# Altium PCB PCB1.PcbDoc (part 2 of 2)
Units mil, origin at the board's own origin, x right, y up, seen from the top; angles counter-clockwise.
Board outline 3500 x 3500 mil, 2 copper layers (Top Layer, Bottom Layer); 93 components, 107 nets, 503 pads, 226 vias.
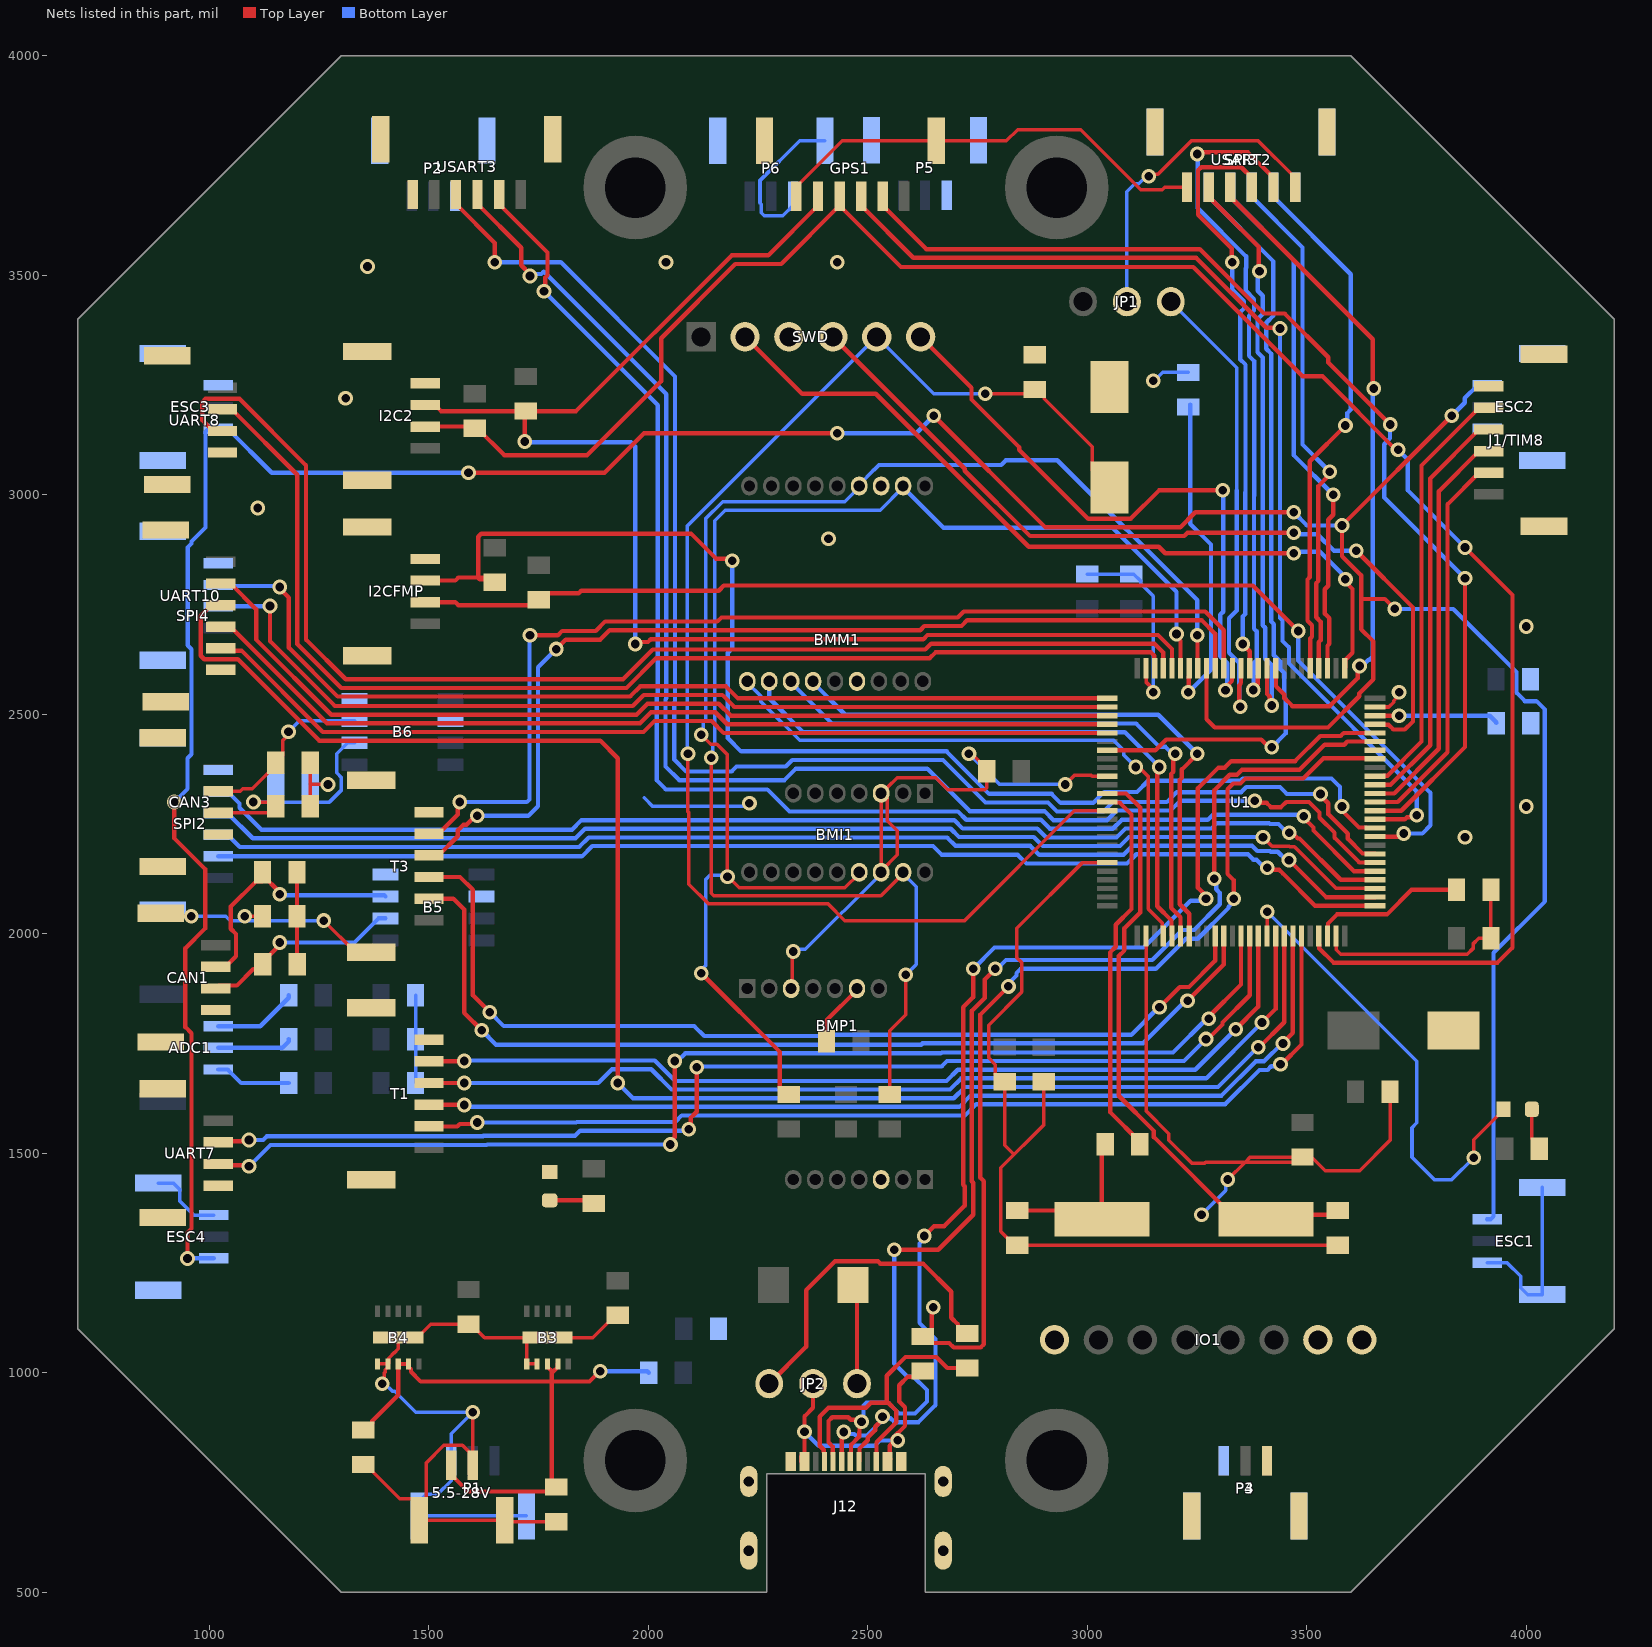
[diagram p2: the nets of this part, all layers, seen from the top]

## Via types
v1: diameter 33.46, hole 19.68, Top Layer to Bottom Layer, 226 vias

## Nets (pads, with @x,y where several pads share a name; then routed paths per layer and width w, separated by ;. In a path a pad name is that pad's centre, name@x,y a point inside that pad or via, vN(x,y) a via of type N, cw(c..) or ccw(c..) an arc to the next point about the centre after c; other vN are vias at no path point) (continued)
GND: 5.5-28V.2 5.5-28V.3 5.5-28V.4 B1(RESET).2 B2.2 B3.1 B3.2 B3.11 B4.1 B4.2 B4.11 B5.2 B5.8 B6.2 B6.8 BMI1.3 BMI1.13 BMM1.3 BMM1.10 BMP1.3 BMP1.10 C1.1 C2.1 C3.2 C4.2 C5.2 C6.1 C7.2 C8.1 C9.1 C10.1 C11.1 C12.1 C13.1 C14.1 C15.1 C16.1 C17.1 C18.1 C19.1 C20.2 CAN1.4 CAN1.5 CAN1.6 CAN3.4 CAN3.5 CAN3.6 ESC1.3 ESC1.4 ESC1.5 ESC2.3 ESC2.4 ESC2.5 ESC3.3 ESC3.4 ESC3.5 ESC4.3 ESC4.4 ESC4.5 GPS1.6 GPS1.7 GPS1.8 I2C2.4 I2C2.5 I2C2.6 I2CFMP.4 I2CFMP.5 I2CFMP.6 IO1.1 IO1.2 IO1.8 J1/TIM8.6 J1/TIM8.7 J1/TIM8.8 J12.1 J12.2 J12.3 J12.4 J12.A1-B12 J12.A12-B1 P1.3 P1.4 P1.5 P2.3 P2.4 P2.5 P3.3 P3.4 P3.5 P4.3 P4.4 P4.5 P5.3 P5.4 P5.5 P6.3 P6.4 P6.5 POWER.K R2.1 R5.1 R18.2 R20.2 R22.2 SPI2.6 SPI2.7 SPI2.8 SPI3.6 SPI3.7 SPI3.8 SPI4.6 SPI4.7 SPI4.8 SWD.3 T1.6 T1.7 T1.8 T3.6 T3.7 T3.8 U1.10 U1.20 U1.27 U1.49 U1.74 U1.99 UART7.4 UART7.5 UART7.6 UART8.4 UART8.5 UART8.6 UART10.4 UART10.5 UART10.6 USART2.6 USART2.7 USART2.8 USART3.6 USART3.7 USART3.8 | length 11622.5
  Top Layer w8: CAN1.5@888.58,2046.65 895.24,2040 v1(958.5,2040) ; v1(1080,2040) C19.1@1120.63,2040 ; v1(1260,2030) 1260.63,2030 1332.68,1957.95 T3.7@1368.11,1957.95 ; C7.2@1350,790.63 1355.91,790.63 1433.8,712.73 1461.87,712.73 1477.56,697.05 5.5-28V.3@1477.56,663.58 ; B4.1@1384.66,1019.96 B4.2@1406.38,1019.96 ; v1(1393.5,975) 1398.38,979.87 1398.38,999.91 1400,1001.53 1400,1006.69 1406.38,1013.07 B4.2@1406.38,1019.96 ; 5.5-28V.2@1599.61,811.22 1576.32,834.51 1533.83,834.51 1493.24,793.93 1493.24,679.27 5.5-28V.3@1477.56,663.58 ; 5.5-28V.2@1599.8,789.76 1599.8,909.8 v1(1600,910) ; B3.2@1746.38,1019.96 B3.1@1722.76,1019.96 1722.76,1070.22 B3.11@1732.54,1080 ; C5.2@1790,660.63 1675.39,660.63 5.5-28V.4@1672.44,663.58 5.5-28V.3@1477.56,663.58 ; C6.1@1930,1130.63 1924.09,1130.63 1873.46,1080 B3.11@1770,1080 B3.11@1732.54,1080 ; BMI1.3@2325,1875 2327.5,1877.5 2327.5,1957 v1(2330,1959.5) ; GPS1.6@2336.97,3680.43 2336.97,3702.09 2441.3,3806.42 GPS1.7@2655.87,3806.42 2815.34,3806.42 2840.87,3831.95 2984.66,3831.95 3121.75,3694.86 3170.46,3694.86 3176.03,3700.43 USART2.6@3226.97,3700.43 ; BMP1.10@2530,2140 BMP1.10@2530,2142.95 ; BMM1.3@2530,2320 BMP1.10@2530,2142.95 ; v1(2730,2410) 2736.54,2410 2770.63,2375.91 C15.1@2770.63,2370 2770.63,2332.41 2765.94,2327.72 2682.21,2327.72 2654.43,2355.5 2566.52,2355.5 2544.08,2333.05 2544.08,2257.49 2567.05,2234.52 2567.05,2180 BMP1.10@2530,2142.95 ; 2830,1500 2812,1518 C9.1@2812,1663 2806.09,1663 2790.41,1678.69 2790.41,1701.82 2774.93,1717.3 2774.93,1791.69 2850.57,1867.34 2850.57,1934.34 2839.25,1945.66 2839.25,2012.66 2988.79,2162.2 U1.20@3044.88,2162.2 ; C10.1@2901,1662.63 2901,1564.65 2802.93,1466.58 2802.93,1321.8 2834.09,1290.63 C2.1@2840,1290.63 C1.1@3570,1290.63 C1.1@3591.21,1290.63 ; v1(2949.71,2340) 2949.98,2340 2971.49,2361.52 3000.06,2361.52 3000.32,2361.26 3008.25,2361.26 3010.46,2359.06 U1.10@3044.88,2359.06 ; U1.27@3133.46,1994.88 3133.46,1596.54 3185.4,1544.6 3185.4,1529.51 3237.34,1477.57 3267.15,1477.57 3269,1479.43 3359.43,1479.43 ; U1.99@3133.46,2605.12 3133.46,2573.43 3150,2556.89 v1(3150,2550) ; v1(3260,1360) v1@3260,1370 ; v1(3320,1440) 3359.43,1479.43 ; C18.1@3490,1491.26 3371.26,1491.26 3359.43,1479.43 ; U1.49@3566.54,1994.88 3566.54,1963.46 3577.07,1952.93 3865.07,1952.93 3878.43,1966.29 3878.43,1976.64 3891.8,1990 C13.1@3919.37,1990 C12.1@3919.37,2100 ; U1.74@3655.12,2516.54 3686.54,2516.54 3697.51,2527.51 3697.51,2530.62 3710,2543.11 v1(3710,2550) ; C4.2@3689.37,1640 3689.37,1529.37 3620,1460 3542.14,1460 3502.14,1500 3481.57,1479.43 3359.43,1479.43 ; B4.2@1406.38,1019.96 1408.28,1021.87 1408.28,1033.18 1420.97,1045.87 1421.65,1045.87 1430,1054.22 B4.11@1430,1080 1473.31,1080 1503.94,1110.63 C8.1@1590,1110.63 1595.91,1110.63 1626.54,1080 B3.11@1732.54,1080
  Bottom Layer w8: ESC4.5@883.58,1432.05 917.05,1432.05 932.73,1416.36 932.73,1390.58 964.1,1359.21 ESC4.3@1009.57,1359.21 ; SPI2.7@893.58,2054.13 907.72,2040 v1(958.5,2040) 1036.89,2040 1046.89,2030 v1(1260,2030) ; v1(1393.5,975) 1399.34,975 1416.74,957.6 1422.4,957.6 1470,910 v1(1600,910) 1550.79,860.79 P1.3@1550.79,799.57 1550.79,754.1 1519.42,722.73 1493.64,722.73 1477.95,707.05 P1.5@1477.95,673.58 P1.4@1722.05,673.58 ; R18.2@1469.37,1660 R20.2@1469.37,1760 R22.2@1469.37,1860 ; 1990,2310 2010,2290 2215.84,2290 2223.11,2297.27 v1(2230,2297.27) ; P6.3@2329.21,3680.43 2329.21,3658.78 2305.92,3635.49 2263.43,3635.49 2256.71,3642.21 2256.71,3662.22 2254.08,3664.85 2254.08,3716.02 2344.47,3806.42 P6.5@2402.05,3806.42 ; v1(2330,1959.5) 2334.87,1964.38 2357.33,1964.38 2530,2137.05 BMP1.10@2530,2140 ; v1(2730,2410) 2800,2340 v1(2949.71,2340) ; C17.1@3000,2819.37 C16.1@3100,2819.37 3105.91,2819.37 3121.59,2803.68 3121.59,2797.78 3150,2769.37 v1(3150,2550) ; v1(3150,3260) 3153.15,3260 3171.89,3278.74 R2.1@3230,3278.74 ; v1(3260,1360) 3315.13,1415.13 3315.13,1435.13 v1(3320,1440) ; ESC1.3@3910.43,1250.79 3955.9,1250.79 3987.27,1219.42 3987.27,1193.64 4002.95,1177.95 ESC1.5@4036.42,1177.95 ESC1.4@4036.42,1422.05
  other v1: 3860,2220 4000,2290 4000,2700 2410,2900 1110,2970 1310,3220 1360,3520 2040,3530 2430,3530
I2C1.SCL: BMM1.9 BMP1.9 R6.1 U1.95 | length 3201.8
  Top Layer w8: v1(2143.34,2401.18) 2143.34,2091.84 2148.52,2086.66 2529.61,2086.66 2580,2137.05 BMP1.9@2580,2140 ; R6.1@2550,1633.74 2550,1779.08 2586.39,1815.47 v1(2586.39,1906.39)
  Top Layer w9.84: U1.95@3212.2,2605.12 3212.2,2667.24
  Bottom Layer w8: v1(2143.34,2401.18) 2146.78,2404.62 2146.78,2428.36 2150.78,2432.36 2150.78,2940.78 2174.72,2964.72 2527.67,2964.72 2580,3017.05 BMM1.9@2580,3020 ; BMP1.9@2580,2140 2580,2137.05 2610,2107.05 2610,1930 v1(2586.39,1906.39)
  Bottom Layer w9.84: BMM1.9@2580,3017.05 2672,2925.04 3057.14,2925.04 3202.92,2779.26 v1(3202.92,2682.92)
I2C1.SDA: BMM1.11 BMP1.11 R7.1 U1.93 | length 3281
  Top Layer w8: v1(2120.21,2453.24) 2141.69,2431.76 2156,2431.76 2180,2407.76 v1(2180,2130) 2181.15,2130 2206.65,2104.5 2447.46,2104.5 2480,2137.05 BMP1.11@2480,2140
  Top Layer w9.84: v1(3250,2680) 3250.79,2679.21 3250.79,2623.7 3251.57,2622.91 U1.93@3251.57,2605.12
  Top Layer w10: v1(2120,1910) 2299.41,1730.59 2299.41,1648.43 2314.09,1633.74 R7.1@2320,1633.74
  Bottom Layer w8: v1(2120,1910) 2120,1916.89 2130,1926.89 2130,2123.11 2140,2133.11 2176.89,2133.11 v1(2180,2130) ; v1(2120.21,2453.24) 2124.3,2457.33 2124.3,2480.27 2130,2485.97 2130,2945.23 2169.27,2984.5 2447.46,2984.5 2480,3017.05 BMM1.11@2480,3020 2480,3022.95 2513.46,3056.42
  Bottom Layer w9.84: 2513.46,3056.42 2525.09,3068.05 2803.5,3068.05 2814.22,3078.77 2931.26,3078.77 3250,2760.02 v1(3250,2680)
I2C2.SCL: GPS1.4 I2C2.2 R13.1 U1.47 | length 4526.7
  Top Layer w9.84: I2C2.2@1491.54,3155.39 1600.45,3155.39 R13.1@1604.58,3151.26 1610.49,3151.26 1671.75,3090 1860,3090 2028.96,3258.96 2028.96,3356.77 2197.93,3525.73 2302.35,3525.73 GPS1.4@2435.39,3658.78 ; GPS1.4@2435.39,3680.43 GPS1.4@2435.39,3658.78 ; U1.47@3527.17,1994.88 3527.17,1977.38 3528.24,1976.3 3528.24,1966.45 3560.53,1934.17 3934.17,1934.17 3968.35,1968.35 3968.35,2771.65 v1(3860,2880) ; v1(3707.73,3102.27) 3703.19,3102.27 3535.46,3270 3489.78,3270 3240.96,3518.82 2575.35,3518.82 GPS1.4@2435.39,3658.78
  Bottom Layer w9.84: v1(3707.73,3102.27) 3730,3080 3730,3010 v1(3860,2880)
I2C2.SDA: GPS1.5 I2C2.3 R14.1 U1.96 | length 3180.4
  Top Layer w9.84: I2C2.3@1491.54,3204.61 1513.19,3204.61 1527.17,3190.63 R14.1@1720,3190.63 ; v1(1718,3121.5) 1718,3188.63 R14.1@1720,3190.63 ; v1(1970,2660) 1974.52,2664.52 1998.84,2664.52 2005.17,2670.85 2626.22,2670.85 2635.76,2680.39 3160.91,2680.39 3192.52,2648.78 U1.96@3192.52,2605.12 ; GPS1.5@2386.18,3680.43 2386.18,3658.78 2272.82,3545.42 2189.77,3545.42 1834.98,3190.63 R14.1@1720,3190.63
  Bottom Layer w9.84: v1(1718,3121.5) 1719.5,3120 1960,3120 1970,3110 v1(1970,2660)
I2CFMP.SCL: I2CFMP.2 R15.1 U1.59 | length 2757.5
  Top Layer w9.84: I2CFMP.2@1491.54,2755.39 1560.06,2755.39 1566.95,2748.5 1737.87,2748.5 1764.76,2775.39 1840.85,2775.39 1846.95,2781.5 2159.96,2781.5 2171.63,2793.16 3376.62,2793.16 v1(3480.12,2689.65) ; U1.59@3655.12,2221.26 3706.94,2221.26 3714.18,2228.5 v1(3720.57,2228.5)
  Bottom Layer w9.84: v1(3480.12,2689.65) 3480,2689.53 3480,2622.38 3781.5,2320.88 3781.5,2246.95 3763.05,2228.5 v1(3720.57,2228.5)
I2CFMP.SDA: I2CFMP.3 R16.1 U1.60 | length 2947.1
  Top Layer w9.84: I2CFMP.3@1491.54,2804.61 1560.06,2804.61 1566.95,2811.5 1612.01,2811.5 R16.1@1629.33,2811.5 ; R16.1@1633.23,2811.5 1639.13,2811.5 R16.1@1650,2800.63 1642.86,2807.77 1615.41,2807.77 1612.01,2811.17 1612.01,2904.19 1619.27,2911.46 2096.91,2911.46 2153.85,2854.52 2186.05,2854.52 v1(2190.57,2850) ; v1(3580,2290) 3584.52,2285.48 3584.52,2276.04 3618.53,2242.02 3636.54,2242.02 3637.62,2240.94 U1.60@3655.12,2240.94
  Bottom Layer w9.84: v1(2190.57,2850) 2190.57,2649.78 2180.57,2639.78 2180.57,2445.96 2211.06,2415.47 2679.17,2415.47 2775.98,2318.66 2918.36,2318.66 2938.91,2298.11 3013.24,2298.11 3038.07,2322.93 3112.93,2322.93 3138.5,2348.5 3348.5,2348.5 3353.86,2353.86 3556.14,2353.86 3575.48,2334.52 3575.48,2294.52 v1(3580,2290)
LED_PIN: D1.K U1.41 | length 1080.9
  Top Layer w8: U1.41@3409.06,1994.88 3409.53,1995.35 3409.53,2049.53 v1(3410,2050) ; v1(3880,1490) 3880,1530.51 3947.52,1598.03 D1.K@3947.52,1600
  Bottom Layer w8: v1(3410,2050) 3750.57,1709.43 3750.57,1569.55 3739.43,1558.4 3739.43,1490.48 3789.9,1440 3830,1440 v1(3880,1490)
NetADC1_1: ADC1.1 R17.1 | length 173.8
  Bottom Layer w9.84: ADC1.1@1019.57,1690.79 1041.22,1690.79 1072.01,1660 R17.1@1180.63,1660
NetADC1_2: ADC1.2 R19.1 | length 172.4
  Bottom Layer w9.84: ADC1.2@1019.57,1740 1165.87,1740 1180.63,1754.76 R19.1@1180.63,1760
NetADC1_3: ADC1.3 R21.1 | length 193.8
  Bottom Layer w9.84: ADC1.3@1019.57,1789.21 1115.75,1789.21 1180.63,1854.09 R21.1@1180.63,1860
NetB5_6: B5.6 CAN1.3 R12.2 | length 459.3
  Top Layer w9.84: CAN1.3@1014.57,1875.39 1021.46,1882.28 1062.28,1882.28 1099.33,1919.33 1105.24,1919.33 R12.2@1120,1934.09 ; R12.2@1121.26,1930 1121.26,1935.91 1160,1974.65 v1(1160,1980)
  Bottom Layer w9.84: v1(1160,1980) 1330,1980 1385,2035 B5.6@1400.75,2035
NetB5_7: B5.7 CAN1.2 R11.2 | length 579.3
  Top Layer w9.84: CAN1.2@1014.57,1924.61 1036.22,1924.61 1060.43,1948.82 1060.43,1999.43 1048.5,2011.36 1048.5,2061.97 1105.87,2119.33 1119.96,2119.33 R11.2@1120.63,2120 ; R11.2@1120.63,2140 1120.63,2134.09 1160,2094.72 v1(1160,2090)
  Bottom Layer w9.84: v1(1160,2090) 1162.5,2087.5 1398.25,2087.5 B5.7@1400.75,2085
NetB6_6: B6.6 CAN3.3 R25.2 | length 542.1
  Top Layer w8: CAN3.3@1019.57,2275.39 1136.02,2275.39 R25.2@1150.63,2290 1140.63,2300 v1(1100,2300)
  Bottom Layer w8: v1(1100,2300) 1273.24,2300 1300.57,2327.34 1300.57,2355.63 1289.74,2366.47 1289.74,2409.74 1315,2435 B6.6@1330.75,2435
NetB6_7: B6.7 CAN3.2 R24.2 | length 404.9
  Top Layer w8: CAN3.2@1019.57,2324.61 1070.09,2324.61 1076.06,2330.57 1097.11,2330.57 1150.63,2384.09 R24.2@1150.63,2390 1166.32,2405.69 1166.32,2439.42 1180,2453.11 v1(1180,2460)
  Bottom Layer w8: v1(1180,2460) 1205,2485 B6.7@1330.75,2485
NetBMI1_6: BMI1.6 R26.2 | length 148.7
  Top Layer w10: R26.2@2405.63,1755 2405.63,1802.68 2475,1872.05 BMI1.6@2475,1875
NetC1_2: C1.2 U1.12 X1.2 | length 1403.5
  Top Layer w9.84: U1.12@3044.88,2319.69 3088.07,2319.69 3120.15,2287.6 3120.15,2048.29 3084.25,2012.39 3084.25,1962.03 3071.39,1949.17 3071.39,1630.79 3151.46,1550.73 3151.46,1536.65 3338.11,1350 X1.2@3407.01,1350 3417.01,1360 C1.2@3580.63,1360
NetC2_2: C2.2 R1.2 X1.1 | length 374.2
  Top Layer w9.84: C2.2@2840,1369.37 3013.62,1369.37 X1.1@3032.99,1350 3032.99,1512.36 R1.2@3040.63,1520
NetC11_2: C11.2 U1.73 | length 284.3
  Top Layer w9.84: U1.73@3655.12,2496.85 3709.84,2496.85 v1(3710,2496.69)
  Bottom Layer w9.84: v1(3710,2496.69) 3916.5,2496.69 3931.26,2481.93 C11.2@3931.26,2480
NetC12_2: C12.2 U1.48 | length 353.3
  Top Layer w9.84: U1.48@3546.85,1994.88 3546.85,2012.38 3547.93,2013.46 3547.93,2023.31 3568.71,2044.09 3682.47,2044.09 3738.38,2100 C12.2@3840.63,2100
NetC19_2: C19.2 R11.1 R12.1 | length 180.3
  Top Layer w9.84: R12.1@1198.74,1940 1199.37,1940.63 1199.37,2030 R11.1@1199.37,2120
NetC20_1: C20.1 R24.1 R25.1 | length 181.3
  Top Layer w8: R25.1@1229.37,2290 1229.37,2340 ; R24.1@1229.37,2390 1229.37,2340 ; v1(1270,2340) 1229.37,2340
  Bottom Layer w8: C20.1@1229.37,2340 v1(1270,2340)
NetD1_1: D1.A R3.2 | length 97
  Top Layer w8: D1.A@4012.48,1600 4012.48,1532.8 4029.37,1515.91 R3.2@4029.37,1510
NetD2_2: D2.2 JP2.3 | length 228.9
  Top Layer w9.84: D2.2@2465.55,1200 2475,1190.55 JP2.3@2475,975
NetJ12_A4-B9: J12.A4-B9 J12.A9-B4 JP2.2 R10.2 | length 700.8
  Top Layer w9.84: J12.A4-B9@2355.51,797.48 2348.23,797.48 2348.23,809.7 2355.51,816.99 2355.51,900.45 2375,919.94 JP2.2@2375,975 ; J12.A9-B4@2544.49,797.48 2550.45,803.45 2549.37,804.53 2549.37,833.9 2557,841.53 v1@2557,847.92 ; v1@2555.31,849.62 2584.49,878.8 2584.49,921.2 2571.38,934.31 2571.38,971.38 2591.08,991.08 2612.45,991.08 R10.2@2625,1003.63 ; v1@2557,845.71 v1(2568.09,845.71)
  Bottom Layer w9.84: v1(2355.51,865.51) 2387.77,833.26 2515,833.26 2527.45,845.71 v1(2568.09,845.71)
NetJ12_A5: J12.A5 J12.B5 R9.1 | length 710.9
  Top Layer w9.84: J12.A5@2400.79,797.48 2399.8,798.46 2399.8,819.06 2399.41,819.46 2399.41,824.27 2390,833.68 2390,900 2410,920 2495.46,920 2506.95,931.5 2540,931.5 ; J12.B5@2518.9,797.48 2519.37,797.95 2519.37,841.53 2546.34,868.5 2564.8,886.95 2564.8,913.05 2546.35,931.5 2540,931.5 ; R9.1@2726,1010.63 2680.81,1010.63 2655.73,1035.72 2585.72,1035.72 2542.98,992.98 2542.98,934.47 2540,931.5
NetJP1_2: JP1.2 USART2.1 | length 738.3
  Top Layer w8: v1(3140,3725.43) 3144.87,3730.31 3160.65,3730.31 3237.34,3806.99 3388.13,3806.99 3473.03,3722.09 USART2.1@3473.03,3700.43
  Bottom Layer w8: JP1.2@3090,3440 3090,3690 3108.17,3708.17 3116.63,3708.17 3133.89,3725.43 v1(3140,3725.43)
NetJP2_1: JP2.1 R9.2 | length 747.9
  Top Layer w9.84: JP2.1@2275,975 2359.16,1059.16 2359.16,1187.93 2424.98,1253.74 2522.74,1253.74 2527.98,1248.5 2625.73,1248.5 2690,1184.23 2690,1125.37 2705.33,1110.04 2705.33,1104.13 2720.09,1089.37 R9.2@2726,1089.37
NetPOWER_1: POWER.A R23.2 | length 102.9
  Top Layer w9.84: POWER.A@1775,1392.52 1868.11,1392.52 R23.2@1875,1385.63
NetR1_1: R1.1 U1.13 | length 867.3
  Top Layer w9.84: U1.13@3044.88,2300 3062.38,2300 3063.46,2298.92 3073.31,2298.92 3100.47,2271.77 3100.47,2056.45 3064.57,2020.55 3064.57,1970.18 3051.71,1957.33 3051.71,1593.57 3119.37,1525.91 R1.1@3119.37,1520
NetR2_2: R2.2 U1.94 | length 752.3
  Top Layer w9.84: v1(3230,2550) 3230.94,2550.94 3230.94,2586.54 3231.89,2587.48 U1.94@3231.89,2605.12
  Bottom Layer w9.84: v1(3230,2550) 3281.5,2601.5 3281.5,2886.67 3234.42,2933.75 R2.2@3234.42,3205.58
NRST: B1(RESET).1 C3.1 SWD.5 U1.14 | length 3233.3
  Top Layer w8: v1(2090,2410) 2090,2278.41 2092.16,2276.25 2092.16,2112.61 2135.95,2068.82 2408.56,2068.82 2447.38,2030 2720,2030 2970.32,2280.32 U1.14@3044.88,2280.32 ; v1(2767.52,3230) 2870,3230 C3.1@2880,3240 2885.91,3240 2901.59,3224.31 2901.59,3218.41 3010.69,3109.31 3010.69,3056.13 3050,3016.83
  Bottom Layer w8: v1(2090,2410) 2088.85,2411.15 2088.85,2929.32 2519.53,3360 SWD.5@2520,3360 2650,3230 v1(2767.52,3230)
SPI1.MISO: BMI1.10 U1.31 | length 1373
  Top Layer w9.84: v1(3200,2410) 3195.48,2405.48 3195.48,2368.76 3190.63,2363.91 3190.63,2059.15 3212.2,2037.58 U1.31@3212.2,1994.88
  Bottom Layer w9.84: BMI1.10@2325,2575 2325,2572.05 2418.02,2479.02 3110.98,2479.02 3164.25,2425.75 3177.86,2425.75 3193.61,2410 v1(3200,2410)
SPI1.MOSI: BMI1.11 U1.32 | length 1385.6
  Top Layer w9.84: U1.32@3231.89,1994.88 3231.89,2045.73 3210.32,2067.3 3210.32,2350.35 3215.17,2355.2 3215.17,2374.48 3250,2409.32 v1(3250,2410)
  Bottom Layer w9.84: BMI1.11@2375,2575 2375,2572.05 2448.34,2498.71 3161.29,2498.71 v1(3250,2410)
SPI1.NSS: BMI1.8 U1.29 | length 1395.9
  Top Layer w8: v1(3110,2380) 3116.89,2380 3132.95,2363.94 3133.26,2363.94 3138.92,2358.28 3138.92,2056.49 3170.83,2024.57 3170.83,2014.38 3172.83,2012.38 U1.29@3172.83,1994.88
  Bottom Layer w8: BMI1.8@2225,2575 2225,2572.05 2256.24,2540.81 2256.24,2528.63 2344.29,2440.57 3059.43,2440.57 3082.28,2417.72 3082.28,2407.72 v1(3110,2380)
SPI1.SCK: BMI1.9 U1.30 | length 1393.1
  Top Layer w9.84: v1(3163.31,2380) 3159.13,2375.83 3159.13,2062.81 3191.6,2030.34 3191.6,1995.8 U1.30@3192.52,1994.88
  Bottom Layer w9.84: BMI1.9@2275,2575 2275,2536.4 2352.06,2459.34 3085.2,2459.34 3163.31,2381.24 v1(3163.31,2380)
SPI2.MISO: SPI2.4 U1.53 | length 2741.7
  Top Layer w7.87: v1(3400,2220) 3420.51,2199.49 3459.71,2199.49 3460.96,2198.24 3471.76,2198.24 3566.85,2103.15 U1.53@3655.12,2103.15
  Bottom Layer w9.84: SPI2.4@1019.57,2274.61 1041.22,2274.61 1098.5,2217.32 1833.81,2217.32 1855.62,2239.13 2688.58,2239.13 2707.48,2220.24 2877.59,2220.24 2898.14,2199.68 3074.18,2199.68 3094.73,2220.24 3399.76,2220.24 v1(3400,2220)
SPI2.MOSI: SPI2.5 U1.54 | length 2769.1
  Top Layer w9.84: v1(3460,2230) 3466.39,2230 3479.45,2216.94 3483.06,2216.94 3577.17,2122.83 U1.54@3655.12,2122.83
  Bottom Layer w9.84: SPI2.5@1019.57,2323.82 1041.22,2323.82 1068.5,2296.54 1068.5,2286.95 1118.45,2237.01 1825.65,2237.01 1847.46,2258.82 2696.74,2258.82 2715.63,2239.92 2885.74,2239.92 2906.3,2219.37 3066.03,2219.37 3086.58,2239.92 3282.61,2239.92 3294.18,2251.5 3413.5,2251.5 3415.18,2249.81 3435.27,2249.81 3455.08,2230 v1(3460,2230)
SPI2.NSS: SPI2.2 U1.51 | length 2718.9
  Top Layer w9.84: v1(3410,2150) 3414.52,2145.48 3436.83,2145.48 3446.42,2135.89 3518.53,2063.78 U1.51@3655.12,2063.78
  Bottom Layer w9.84: SPI2.2@1019.57,2176.18 1848.34,2176.18 1871.93,2199.76 2648.35,2199.76 2668.43,2179.68 2841.45,2179.68 2861.14,2160 3090.17,2160 3111.04,2180.87 3365.6,2180.87 3378.03,2168.44 3385.17,2168.44 3403.61,2150 v1(3410,2150)
SPI2.SCK: SPI2.3 U1.52 | length 2729.4
  Top Layer w9.84: v1(3459.06,2167.79) 3543.39,2083.46 U1.52@3655.12,2083.46
  Bottom Layer w9.84: SPI2.3@1019.57,2225.39 1041.22,2225.39 1068.98,2197.64 1841.96,2197.64 1863.77,2219.45 2680.43,2219.45 2699.33,2200.55 2869.44,2200.55 2889.99,2180 3082.34,2180 3102.89,2200.55 3374.91,2200.55 3386.95,2188.5 3416.25,2188.5 3417.93,2186.82 3433.64,2186.82 3452.67,2167.79 v1(3459.06,2167.79)
SPI3.MISO: SPI3.4 U1.79 | length 1187.8
  Top Layer w9.84: U1.79@3527.17,2605.12 3527.17,2664.32 3531.3,2668.45 3531.3,2710.85 3521.09,2721.07 3521.09,2798.71 3526.2,2803.81 3526.2,3019.8 3552.27,3045.88 v1(3552.27,3052.27)
  Bottom Layer w9.84: SPI3.4@3374.61,3700.43 3374.61,3678.78 3489.99,3563.4 3489.99,3114.55 v1(3552.27,3052.27)
SPI3.MOSI: SPI3.5 U1.80 | length 1215.1
  Top Layer w9.84: U1.80@3507.48,2605.12 3507.48,2643.38 3507.48,2672.47 3511.62,2676.61 3511.62,2702.7 3501.4,2712.92 3501.4,2806.86 3506.51,2811.97 3506.51,3076.51 v1(3587.73,3157.73)
  Bottom Layer w9.84: SPI3.5@3423.82,3700.43 3423.82,3678.78 3600,3502.6 3600,3194.15 3592.25,3186.4 3592.25,3162.25 v1(3587.73,3157.73)
SPI3.NSS: SPI3.2 U1.7 | length 1768
  Top Layer w9.84: U1.7@3044.88,2418.11 3154.87,2418.11 3179.41,2442.65 3395.84,2442.65 3413.78,2424.7 v1(3420.18,2424.7)
  Bottom Layer w9.84: SPI3.2@3276.18,3700.43 3276.18,3678.78 3423.59,3531.37 3423.59,3408.13 3407.31,3391.86 3407.31,3332.74 3419.12,3320.93 3419.12,2981.51 3418.82,2981.2 3418.82,2711.16 3424.8,2705.17 3424.8,2634.61 3439.37,2620.05 3439.37,2602.79 3448.5,2593.66 3448.5,2536.95 3451.5,2533.96 3451.5,2456.02 v1(3420.18,2424.7)
SPI3.SCK: SPI3.3 U1.78 | length 1206.4
  Top Layer w9.84: U1.78@3546.85,2605.12 3546.85,2656.16 3550.99,2660.3 3550.99,2719.01 3540.77,2729.22 3540.77,2784.89 3548.5,2792.62 3548.5,2943.05 3560,2954.54 v1(3560,3000)
  Bottom Layer w9.84: SPI3.3@3325.39,3700.43 3325.39,3678.78 3470.31,3533.87 3470.31,3089.69 v1(3560,3000)
SPI4.MISO: SPI4.4 U1.4 | length 2131.8
  Top Layer w9.84: SPI4.4@1025.98,2699.53 1047.64,2699.53 1267.8,2479.37 1980.72,2479.37 2005.78,2504.42 2152.11,2504.42 2179.37,2477.17 U1.4@3044.88,2477.17
SPI4.MOSI: SPI4.5 U1.5 | length 2119.5
  Top Layer w9.84: SPI4.5@1025.98,2650.32 1031.3,2645 1072.74,2645 1258.05,2459.68 1988.88,2459.68 2013.93,2484.74 2143.96,2484.74 2171.21,2457.48 U1.5@3044.88,2457.48
SPI4.NSS: SPI4.2 U1.3 | length 2204.9
  Top Layer w9.84: SPI4.2@1025.98,2797.95 1047.64,2797.95 1106.18,2739.41 1106.18,2670.3 1277.43,2499.05 1972.57,2499.05 1997.62,2524.11 2160.27,2524.11 2187.52,2496.85 U1.3@3044.88,2496.85
SPI4.SCK: SPI4.3 U1.43 | length 3734.6
  Top Layer w9.84: SPI4.3@1025.98,2748.74 1004.33,2748.74 980.12,2724.53 980.12,2633.37 988.17,2625.32 1064.59,2625.32 1249.9,2440 1890,2440 1930,2400 v1(1930,1660) ; v1(3389.51,1741.07) 3391.07,1741.07 3448.43,1798.43 U1.43@3448.43,1994.88
  Bottom Layer w9.84: v1(1930,1660) 1964.72,1625.28 2695.28,1625.28 2720.87,1650.87 3297.35,1650.87 3387.55,1741.07 v1(3389.51,1741.07)
SWCLK: SWD.2 U1.76 | length 1818.2
  Top Layer w9.84: SWD.2@2220,3360 2350,3230 2517.62,3230 2866.12,2881.5 3162.58,2881.5 3177.07,2867 v1(3470,2867) ; U1.76@3586.22,2605.12 3587.3,2606.2 3587.3,2623.7 3603.76,2640.16 3603.76,2785.3 3587.73,2801.34 v1(3587.73,2807.73)
  Bottom Layer w9.84: v1(3470,2867) 3473,2870 3530,2870 3587.73,2812.27 v1(3587.73,2807.73)
SWDIO: SWD.4 U1.72 | length 1944.1
  Top Layer w9.84: SWD.4@2420,3360 2720.64,3059.36 2720.64,3054.82 2869.46,2906 3220.77,2906 3228.08,2913.31 v1(3470,2913.31) ; v1(3612.27,2872.27) 3741.5,2743.05 3741.5,2483.65 3723.05,2465.2 3696.95,2465.2 3686.06,2476.09 3673.7,2476.09 3672.62,2477.17 U1.72@3655.12,2477.17
  Bottom Layer w9.84: v1(3470,2913.31) 3472.99,2910.32 3523.61,2910.32 3561.65,2872.27 v1(3612.27,2872.27)
SWO: SWD.6 U1.89 | length 1429.3
  Top Layer w9.84: SWD.6@2620,3360 2736.02,3243.98 2736.02,3216.95 2844.36,3108.62 2844.36,3102.57 3001.56,2945.37 3098.44,2945.37 3163.07,3010 v1(3308.58,3010) ; v1(3314.57,2555.04) 3314.57,2561.44 3329.24,2576.1 3329.24,2586.54 3330.32,2587.62 U1.89@3330.32,2605.12
  Bottom Layer w9.84: v1(3308.58,3010) 3309.45,3009.13 3309.45,2733.73 3302.76,2727.04 3302.76,2632.19 3318.5,2616.44 3318.5,2558.98 v1(3314.57,2555.04)
T1.CH1: T1.5 U1.40 | length 2140.5
  Top Layer w9.84: T1.5@1500,1709.21 1500.39,1709.61 1579.61,1709.61 v1(1580,1710) ; v1(3337.73,1782.27) 3389.37,1833.91 U1.40@3389.37,1994.88
  Bottom Layer w9.84: v1(1580,1710) 1581.18,1711.18 2014.28,1711.18 2060.8,1664.65 2678.98,1664.65 2704.56,1690.24 3245.69,1690.24 v1(3337.73,1782.27)
T1.CH2: T1.4 U1.42 | length 2203.3
  Top Layer w9.84: T1.4@1500,1660 v1(1580,1660) ; v1(3397.73,1797.73) 3428.74,1828.74 U1.42@3428.74,1994.88
  Bottom Layer w9.84: v1(1580,1660) 1885.46,1660 1916.95,1691.5 2006.12,1691.5 2052.65,1644.97 2687.13,1644.97 2712.71,1670.55 3270.55,1670.55 v1(3397.73,1797.73)
T1.CH3: T1.3 U1.44 | length 2261.7
  Top Layer w9.84: T1.3@1500,1610.79 1500.39,1610.39 1579.61,1610.39 v1(1580,1610) ; v1(3445.46,1750) 3445.46,1751.85 3468.11,1774.5 U1.44@3468.11,1994.88
  Bottom Layer w9.84: v1(1580,1610) 1584.4,1605.6 2708.33,1605.6 2733.91,1631.18 3305.5,1631.18 3383.69,1709.37 3402.35,1709.37 3442.98,1750 v1(3445.46,1750)
T1.CH4: T1.2 U1.45 | length 2312.7
  Top Layer w9.84: T1.2@1500,1561.57 1500.79,1560.79 1564.16,1560.79 1570.03,1566.66 1606.66,1566.66 v1(1610,1570) ; v1(3440,1702.48) 3442.48,1702.48 3487.8,1747.8 U1.45@3487.8,1994.88
  Bottom Layer w9.84: v1(1610,1570) 1835.27,1570 1836.45,1571.18 2060.81,1571.18 2075.54,1585.91 2720.91,1585.91 2746.5,1611.5 3313.66,1611.5 3391.85,1689.68 3410.45,1689.68 3411.44,1690.67 ; 3411.49,1690.67 3418.78,1697.96 3435.48,1697.96 v1(3440,1702.48)
T3.CH1: T3.5 U1.90 | length 2357.2
  Top Layer w9.84: T3.5@1500,2227.64 1521.65,2227.64 1565.48,2271.46 1565.48,2295.48 v1(1570,2300) ; v1(1730,2680) 1793.66,2680 1803.34,2689.68 1879.68,2689.68 1901.18,2711.18 2156.86,2711.18 2166.31,2720.63 2704.79,2720.63 2718.26,2734.1 3268.28,2734.1 3310.63,2691.75 U1.90@3310.63,2605.12
  Bottom Layer w9.84: v1(1570,2300) 1723.05,2300 1728.82,2305.77 1728.82,2678.82 v1(1730,2680)
T3.CH2: T3.4 U1.91 | length 2297.3
  Top Layer w9.84: T3.4@1500,2178.43 1521.65,2178.43 1565.41,2222.19 1565.41,2235.41 1578.5,2248.5 1585.46,2248.5 1605.46,2268.5 v1(1610,2268.5) ; v1(1790,2648.5) 1811.5,2670 1890,2670 1911.5,2691.5 2619.03,2691.5 2628.48,2700.95 2712.94,2700.95 2726.41,2714.42 3260.13,2714.42 3290.94,2683.6 U1.91@3290.94,2605.12
  Bottom Layer w9.84: v1(1610,2268.5) 1726.34,2268.5 1748.5,2290.67 1748.5,2607.01 v1(1790,2648.5)
T3.CH3: T3.3 U1.35 | length 2208.9
  Top Layer w9.84: T3.3@1500,2129.21 1570.79,2129.21 1600,2100 1600,1860 v1(1638.5,1821.5) ; v1(3164.04,1832.47) 3210.39,1878.82 3231.2,1878.82 3290.94,1938.56 U1.35@3290.94,1994.88
  Bottom Layer w9.84: v1(1638.5,1821.5) 1670,1790 2103.96,1790 2126.95,1767.01 2404.62,1767.01 2407.71,1770.09 3100.09,1770.09 3162.47,1832.47 v1(3164.04,1832.47)
T3.CH4: T3.2 U1.36 | length 2227
  Top Layer w9.84: T3.2@1500,2080 1555.46,2080 1580.32,2055.14 1580.32,1819.68 v1(1620,1780) ; v1(3228.19,1847.32) 3310.63,1929.77 U1.36@3310.63,1994.88
  Bottom Layer w9.84: v1(1620,1780) 1652.67,1747.33 2118.79,1747.33 ; 2118.8,1747.32 2621.25,1747.32 2624.33,1750.4 3126.78,1750.4 3223.7,1847.32 v1(3228.19,1847.32)
TIM8_CH1/USART6_TX: J1/TIM8.2 U1.63 | length 900.6
  Top Layer w9.84: U1.63@3655.12,2300 3706.93,2300 3820.24,2413.3 3820.24,2978.19 3892.36,3050.32 J1/TIM8.2@3914.02,3050.32
TIM8_CH2/USART6_RX: J1/TIM8.3 U1.64 | length 925.3
  Top Layer w9.84: U1.64@3655.12,2319.68 3698.78,2319.68 3800.55,2421.46 3800.55,3007.72 3892.36,3099.53 J1/TIM8.3@3914.02,3099.53
TIM8_CH3/USART6_CK: J1/TIM8.4 U1.65 | length 950.1
  Top Layer w9.84: U1.65@3655.12,2339.37 3690.63,2339.37 3780.87,2429.61 3780.87,3037.24 3892.36,3148.74 J1/TIM8.4@3914.02,3148.74
TIM8_CH4: J1/TIM8.5 U1.66 | length 974.8
  Top Layer w9.84: U1.66@3655.12,2359.06 3672.62,2359.06 3673.7,2360.13 3683.55,2360.13 3761.18,2437.76 3761.18,3066.64 3861.5,3166.95 3861.5,3167.09 3892.36,3197.95 J1/TIM8.5@3914.02,3197.95
TLM: ESC1.1 ESC2.1 ESC3.1 ESC4.1 U1.92 | length 8030.5
  Top Layer w9.84: v1(920,2300) 920,2217.3 990,2147.3 990,2012.07 945.08,1967.14 945.08,1787.22 959.13,1773.17 959.13,1328.52 950,1319.39 v1(950,1260) ; v1(1590,3050) 1900,3050 1990,3140 v1(2430,3140) ; v1(2650,3180) 2904.31,2925.69 3211.35,2925.69 3245.66,2960 v1(3470,2960) ; U1.92@3271.26,2605.12 3271.26,2488.74 3290,2470 3548.17,2470 3619.22,2541.05 3619.22,2547.36 3651.5,2579.64 3651.5,2665.64 3623.45,2693.69 3623.45,2762.38 ; v1(3700,2740) 3677.62,2762.38 3623.45,2762.38 ; v1(3830,3180) v1(3580,2930) 3580,2860 3623.45,2816.55 3623.45,2762.38
  Bottom Layer w9.84: v1(920,2300) 950,2330 950,2399.69 959.13,2408.82 959.13,2648.17 950.08,2657.22 950.08,2880.09 959.13,2889.14 959.13,2893.68 991.02,2925.57 991.02,3143.9 997.91,3150.79 ESC3.1@1019.57,3150.79 1041.22,3150.79 1142.01,3050 v1(1590,3050) ; v1(950,1260) 950.39,1260.39 1009.17,1260.39 ESC4.1@1009.57,1260.79 ; v1(2430,3140) 2610,3140 v1(2650,3180) ; v1(3470,2960) 3500,2930 v1(3580,2930) ; v1(3700,2740) 3833.44,2740 3977.28,2596.16 3977.28,2549.27 3996.56,2530 4022.81,2530 4042.09,2510.73 4042.09,2073.66 3925.04,1956.61 3925.04,1356.1 3918.15,1349.21 ESC1.1@3910.43,1349.21 ; v1(3830,3180) 3859.8,3209.8 3859.8,3220.24 3888.78,3249.21 ESC2.1@3910.43,3249.21
UART7.RX: U1.38 UART7.3 | length 2722.8
  Top Layer w9.84: UART7.3@1019.57,1475.39 1022.26,1472.7 1087.3,1472.7 v1(1090,1470) ; v1(2050,1520) 2050,1526.39 2060,1536.39 v1(2060,1710) ; v1(3276.23,1806.28) 3276.23,1810.78 3350,1884.54 U1.38@3350,1994.88
  Bottom Layer w9.84: v1(1090,1470) 1138.82,1518.82 1631.2,1518.82 1632.38,1520 v1(2050,1520) ; v1(2060,1710) 2066.39,1710 2084.04,1727.64 2110.64,1727.64 2665.84,1727.64 2667.81,1729.61 3195.06,1729.61 3271.74,1806.28 v1(3276.23,1806.28)
UART7.TX: U1.39 UART7.2 | length 2699
  Top Layer w9.84: UART7.2@1019.57,1524.61 1022.26,1527.3 1087.3,1527.3 v1(1090,1530) ; v1(2091.5,1554.42) 2096.02,1558.94 2096.02,1580.46 2106.39,1590.83 2106.39,1590.94 2110,1594.54 v1(2109.97,1696.15) ; v1(3270,1760) 3274.49,1760 3307.73,1793.24 3307.73,1797.73 3369.68,1859.68 U1.39@3369.68,1994.88
  Bottom Layer w9.84: v1(1090,1530) 1122.16,1530 1130.67,1538.5 1623.05,1538.5 1624.23,1539.68 1832.8,1539.68 1844.61,1551.5 2088.58,1551.5 v1(2091.5,1554.42) ; v1(2109.97,1696.15) 2111.38,1697.56 2667.87,1697.56 2680.24,1709.92 3219.92,1709.92 v1(3270,1760)
UART8.RX: U1.97 UART8.3 | length 2864.7
  Top Layer w9.84: UART8.3@1029.57,3145.39 1007.91,3145.39 983.7,3169.61 983.7,3211.55 990.97,3218.82 1068.17,3218.82 1220,3066.99 1220,2670 1310.32,2579.68 1941.85,2579.68 2009.7,2647.54 2630.75,2647.54 2643.92,2660.7 3152.76,2660.7 3172.83,2640.63 U1.97@3172.83,2605.12
UART8.TX: U1.98 UART8.2 | length 2676.9
  Top Layer w9.84: UART8.2@1029.57,3194.61 1051.22,3194.61 1200,3045.83 1200,2660 1300,2560 1950,2560 2017.85,2627.85 2640.72,2627.85 2653.88,2641.02 3144.6,2641.02 3152.07,2633.55 3152.07,2623.7 3153.15,2622.62 U1.98@3153.15,2605.12
UART9_RX: GPS1.3 U1.61 | length 2428.5
  Top Layer w9.84: GPS1.3@2484.61,3680.43 2484.61,3658.78 2603.39,3540 3247.62,3540 3407.31,3380.31 3437.31,3380.31 v1(3438.81,3378.81) ; U1.61@3655.12,2260.63 3723.24,2260.63 3728.09,2265.48 3745.48,2265.48 v1(3750,2270)
  Bottom Layer w9.84: v1(3438.81,3378.81) 3438.81,2973.35 3438.5,2973.05 3438.5,2719.31 3444.49,2713.33 3444.49,2666.95 3459.05,2652.39 3459.05,2615.49 3750,2324.54 v1(3750,2270)
UART9_TX: GPS1.2 U1.62 | length 2473.1
  Top Layer w9.84: GPS1.2@2533.82,3680.43 2533.82,3658.78 2632.91,3559.68 3255.77,3559.68 3402.57,3412.89 3449.27,3412.89 3548.7,3313.46 3548.7,3301.3 v1(3690,3160) ; U1.62@3655.12,2280.32 3715.09,2280.32 3860,2425.23 v1(3860,2810)
  Bottom Layer w9.84: v1(3690,3160) 3689.42,3159.42 3689.42,3128.5 3676.23,3115.32 3676.23,2993.77 v1(3860,2810)
UART10.RX: U1.1 UART10.3 | length 2220.6
  Top Layer w9.84: v1(1160,2790) 1160,2786.09 1180.32,2765.77 1180.32,2651.85 1291.85,2540.32 1958.15,2540.32 1981.31,2563.48 2176.57,2563.48 2203.83,2536.22 U1.1@3044.88,2536.22
  Bottom Layer w9.84: UART10.3@1019.57,2794.61 1021.87,2792.3 1157.7,2792.3 v1(1160,2790)
UART10.TX: U1.2 UART10.2 | length 2188.9
  Top Layer w9.84: v1(1137.68,2746.76) 1137.68,2666.65 1285.58,2518.74 1964.42,2518.74 1989.47,2543.79 2168.42,2543.79 2195.68,2516.54 U1.2@3044.88,2516.54
  Bottom Layer w9.84: UART10.2@1019.57,2745.39 1020.25,2746.07 1137,2746.07 v1(1137.68,2746.76)
USART2_CK: JP1.1 U1.88 | length 1093.9
  Top Layer w9.84: v1(3348.42,2517.15) 3346.06,2519.51 3346.06,2565.67 3348.72,2568.33 3348.72,2570.81 3350,2572.09 U1.88@3350,2605.12
  Bottom Layer w8: JP1.1@3190,3440 3340.38,3289.62 3340.38,3010
  Bottom Layer w9.84: 3340.38,3010 3340.08,3009.69 3340.08,2736.53 3322.44,2718.89 3322.44,2640.34 3346.06,2616.72 3346.06,2519.51 v1(3348.42,2517.15)
USART2_CTS: U1.84 USART2.4 | length 1551.4
  Top Layer w9.84: USART2.4@3325.39,3700.43 3325.39,3678.78 3650,3354.17 3650,3244.54 v1(3652.27,3242.27) ; U1.84@3428.74,2605.12 3429.66,2604.2 3429.66,2563.8 3448.5,2544.96 3448.5,2536.95 3466.95,2518.5 3552.13,2518.5 3615.48,2581.85 3615.48,2605.48 v1(3620,2610)
  Bottom Layer w9.84: v1(3620,2610) 3626.39,2610 3640.93,2624.54 3643.04,2624.54 3650,2631.5 3650,3240 v1(3652.27,3242.27)
USART2_RTS: U1.85 USART2.5 | length 1342.9
  Top Layer w9.84: USART2.5@3276.18,3700.43 3276.18,3678.78 3390,3564.96 3390,3511.58 v1(3392.09,3509.49) ; U1.85@3409.06,2605.12 3409.06,2546.26 3415.48,2539.83 3415.48,2524.52 v1(3420,2520)
  Bottom Layer w9.84: v1(3392.09,3509.49) 3388.19,3505.58 3388.19,3464.89 3399.44,3453.64 3399.44,3411.82 3387.63,3400.01 3387.63,3324.58 3399.44,3312.77 3399.44,2989.66 3399.13,2989.35 3399.13,2703 3405.12,2697.02 3405.12,2626.46 3419.68,2611.89 3419.68,2520.32 v1(3420,2520)
USART2_RX: U1.87 USART2.3 | length 1352
  Top Layer w9.84: v1(3330,3530) 3328.5,3531.5 3328.5,3561.5 3251.97,3638.03 3251.97,3739.03 3259.23,3746.3 3350.39,3746.3 3374.61,3722.09 USART2.3@3374.61,3700.43 ; v1(3353.94,2660) 3353.94,2659.07 3369.68,2643.32 U1.87@3369.68,2605.12
  Bottom Layer w9.84: v1(3330,3530) 3330,3467.4 3356.55,3440.85 3356.55,3424.61 3348.26,3416.32 3348.26,3308.28 3360.07,3296.47 3360.07,3005.97 3359.76,3005.66 3359.76,2728.37 3353.94,2722.55 v1(3353.94,2660)
USART2_TX: U1.86 USART2.2 | length 1567
  Top Layer w9.84: v1(3250,3776.41) 3253.59,3780 3365.91,3780 3423.82,3722.09 USART2.2@3423.82,3700.43 ; v1(3377.56,2555.11) 3377.56,2557.5 3388.29,2568.23 3388.29,2586.54 3389.37,2587.62 U1.86@3389.37,2605.12
  Bottom Layer w9.84: v1(3250,3776.41) 3251.18,3775.23 3251.18,3653.36 3361.5,3543.05 3361.5,3516.95 3360.6,3516.06 3360.6,3464.64 3379.45,3445.79 3379.45,3419.67 3367.94,3408.16 3367.94,3316.43 3379.75,3304.62 3379.75,2997.81 3379.45,2997.51 3379.45,2694.85 3385.43,2688.87 3385.43,2623.1 3379.01,2616.68 3379.01,2556.56 v1(3377.56,2555.11)
USART3_CK: U1.57 USART3.4 | length 3359.5
  Top Layer w9.84: USART3.4@1561.26,3684.02 1561.26,3662.36 1650,3573.62 v1(1650,3530) ; v1(3531.03,2318.5) 3531.03,2314.64 3548.5,2297.17 3548.5,2272.56 3593.31,2227.75 3593.31,2216.34 3626.69,2182.97 3636.54,2182.97 3637.62,2181.89 U1.57@3655.12,2181.89
  Bottom Layer w9.84: v1(1650,3530) 1800,3530 2060.55,3269.45 2060.55,2528.27 2058.5,2526.22 2058.5,2396.95 2085.77,2369.68 2189.47,2369.68 2200.65,2380.87 2312.75,2380.87 2327.67,2395.79 2671.02,2395.79 2767.83,2298.98 2910.21,2298.98 2930.76,2278.43 3036.53,2278.43 3058.42,2300.32 3181.04,2300.32 3203.32,2322.6 3350.44,2322.6 3362.01,2334.17 3438.71,2334.17 3454.38,2318.5 v1(3531.03,2318.5)
USART3_RX: U1.56 USART3.3 | length 3302.9
  Top Layer w9.84: USART3.3@1610.47,3684.02 1610.47,3662.36 1710,3562.84 1710,3523.04 1730,3503.04 v1(1730,3498.5) ; v1(3381.5,2302.68) 3386.02,2298.16 3408.26,2298.16 3417.91,2288.5 3441.04,2288.5 3452.78,2300.24 3504.75,2300.24 3528.82,2276.18 3528.82,2264.41 3562.91,2230.32 3562.91,2218.91 3619.61,2162.2 U1.56@3655.12,2162.2
  Bottom Layer w9.84: v1(1730,3498.5) 1734.52,3503.02 1756.02,3503.02 1761.5,3508.5 2040.87,3229.13 2040.87,2536.42 2038.82,2534.37 2038.82,2381.18 2070,2350 2309.72,2350 2335.82,2376.1 2635.13,2376.1 2731.94,2279.29 2902.05,2279.29 2922.6,2258.74 3044.69,2258.74 3066.58,2280.63 3189.19,2280.63 3211.24,2302.68 v1(3381.5,2302.68)
USART3_TX: U1.55 USART3.2 | length 3246.3
  Top Layer w9.84: USART3.2@1659.68,3684.02 1659.68,3662.36 1770,3552.05 1770,3499.89 1765.08,3494.97 1765.08,3466.57 v1(1761.98,3463.48) ; v1(3492.97,2267.48) 3492.97,2263.99 3514.95,2242.01 3514.95,2235.05 3607.48,2142.52 U1.55@3655.12,2142.52
  Bottom Layer w9.84: v1(1761.98,3463.48) 2021.18,3204.28 2021.18,2544.57 2019.13,2542.53 2019.13,2349.31 2039.68,2328.76 2270.96,2328.76 2321.22,2278.5 2704.89,2278.5 2723.79,2259.61 2893.9,2259.61 2914.45,2239.05 3057.88,2239.05 3078.43,2259.61 3274.45,2259.61 3286.03,2271.18 3489.27,2271.18 v1(3492.97,2267.48)
USB.D+: J12.A6 J12.B6 U1.71 | length 2836.4
  Top Layer w9.84: J12.A6@2440.16,797.48 2440.16,860.27 v1(2444.64,864.75) ; J12.B6@2479.53,797.48 2480.51,798.46 2480.51,814.21 2480.91,814.61 2480.91,827.4 2499.68,846.18 2499.68,852.04 2516.77,869.13 2516.77,877.07 2533.31,893.61 v1(2533.31,900) ; v1(2627.99,1311.5) 2628.1,1311.5 2650.31,1333.71 2673.54,1333.71 2720.28,1380.45 2720.28,1424.48 2716.8,1427.96 2716.8,1832.47 2740,1855.68 v1(2740,1920) ; v1(3270,2080) 3270,2086.39 3251.57,2104.82 3251.57,2331.57 3298.5,2378.5 3313.05,2378.5 3327.77,2393.23 3419,2393.23 ; 3419.03,2393.21 3473.21,2393.21 3530.32,2450.32 3576.74,2450.32 3583.9,2457.48 U1.71@3655.12,2457.48
  Bottom Layer w9.84: v1(2444.64,864.75) 2449.16,860.23 2469,860.23 2472.23,857.01 2498.32,857.01 2528.79,887.47 2528.79,895.48 v1(2533.31,900) ; v1@2533.31,896.12 2551.5,896.12 2560.23,887.39 2615.29,887.39 2654.06,926.16 2654.06,1076.81 2617.31,1113.55 2617.31,1294.43 2627.99,1305.1 v1(2627.99,1311.5) ; v1(2740,1920) 2788.5,1968.5 3128.5,1968.5 3235.48,2075.48 3243.98,2075.48 3265.48,2075.48 v1(3270,2080)
USB.D-: J12.A7 J12.B7 U1.70 | length 2918.1
  Top Layer w9.84: J12.B7@2420.47,797.48 2420.47,813.23 2419.49,814.21 2419.49,832.03 2410,841.52 2410,890 2418.64,898.64 2455.29,898.64 2460.91,893.02 2480.76,893.02 v1(2485.28,888.5) ; J12.A7@2459.84,797.48 2459.84,813.23 2460.83,814.21 2460.83,819.06 2461.22,819.46 2461.22,835.55 2480,854.33 2480,863.92 2480.76,864.68 v1@2480.76,888.5 ; v1(2560,1280) 2660,1280 2739.97,1359.97 2739.97,1432.63 2736.48,1436.12 2736.48,1824.32 2765.93,1853.77 2765.93,1895.93 v1(2790,1920) ; v1(3288.77,2125.09) 3288.77,2326.6 3324.13,2361.97 3340.57,2361.97 3352.14,2373.54 3410.85,2373.54 ; 3410.87,2373.52 3483.3,2373.52 3540.41,2430.63 3584.89,2430.63 3592.06,2437.8 U1.70@3655.12,2437.8
  Bottom Layer w9.84: v1(2485.28,888.5) 2489.8,893.02 2489.8,925.07 2496.68,931.96 2545.89,931.96 2564.8,913.05 2564.8,912.84 2570.57,907.07 2607.14,907.07 2634.37,934.31 2634.37,960.4 2604.01,990.76 2590.36,990.76 2560,1021.12 v1(2560,1280) ; v1(2790,1920) 2794.54,1920 2814.54,1940 3147.62,1940 3216.1,2008.48 3243.02,2008.48 3301.5,2066.95 3301.5,2093.05 3293.29,2101.26 3293.29,2120.57 v1(3288.77,2125.09)
USB.ID: U1.69
USB.VBUS: R10.1 U1.68 | length 2302.3
  Top Layer w9.84: R10.1@2625,1082.37 2630.91,1082.37 2645.67,1097.13 2645.67,1145.67 v1(2648.81,1148.81) ; R10.1@2627.95,1079.42 2639.76,1067.61 2684.95,1067.61 2695.27,1057.28 2756.73,1057.28 2763.99,1064.55 2763.99,1436.44 2756.17,1444.27 2756.17,1816.17 v1(2820,1880) ; v1(3332.99,2079.38) 3332.99,2122.46 3319.12,2136.32 3319.12,2329.12 3332.28,2342.28 3348.72,2342.28 3360.3,2353.86 3402.7,2353.86 3491.46,2353.84 3537.61,2399.99 3626.47,2399.99 3626.95,2399.5 3654.04,2399.5 U1.68@3655.12,2398.43
  Bottom Layer w9.84: v1(2820,1880) 2820,1886.39 2838.44,1904.83 2838.44,1910.34 2848.1,1920 3155.46,1920 3224.25,1988.79 3251.17,1988.79 3321.18,2058.8 3321.18,2061.17 3332.99,2072.99 v1(3332.99,2079.38)
VIN: 5.5-28V.1 B3.3 B3.4 B4.3 B4.4 C5.1 C7.1 R4.2 | length 1379.5
  Top Layer w9.84: C7.1@1350,869.37 1355.91,869.37 1370.67,884.13 1370.67,890.04 1430,949.37 B4.3@1430,1019.96 B4.4@1453.62,1019.96 1453.62,1013.07 1458.94,1007.76 1458.94,1002.03 1480.97,980 1780,980 ; 5.5-28V.1@1550.39,789.57 1550.39,767.91 1588.94,729.37 1780,729.37 1780,980 ; B3.3@1770,1019.96 1770,1013.07 1780,1003.07 ; B3.4@1793.62,1019.96 1793.62,1013.07 1783.62,1003.07 1780,1003.07 ; v1(1890,1003.46) 1888.92,1003.46 1865.46,980 1780,980 ; 1780,980 1780,1003.07
  Bottom Layer w9.84: v1(1890,1003.46) 1997.17,1003.46 R4.2@2000.63,1000
pads on no net: ADC1.4 ADC1.5 B3.5 B3.8 B3.9 B3.10 B4.5 B4.8 B4.9 B4.10 B5.5 B6.5 BMI1.4 BMI1.5 BMI1.14 BMI1.15 BMI1.16 BMM1.5 BMM1.6 BMM1.7 BMM1.12 BMM1.13 BMM1.14 BMM1.15 BMM1.16 BMP1.4 BMP1.5 BMP1.6 BMP1.7 BMP1.12 BMP1.13 BMP1.14 BMP1.15 BMP1.16 J12.A8 J12.B8 USART3.5

## Polygon pours and split planes (outlines as drawn)
GND on Top Layer "GND_L01_P001" (solid, remove dead copper, pour order 1): 2630,500 2630,770 2270,770 2270,500 1300,500 700,1100 700,3400 1300,4000 3600,4000 4200,3400 4200,1100 3600,500 3500,500
GND on Top Layer "QUARTZ_pad" (solid, remove dead copper, pour order 0): 2850,1250 2850,1370 2960,1480 3480,1480 3530,1430 3530,1250
GND on Bottom Layer "GND_L02_P002" (solid, remove dead copper, pour order 2): 2630,500 2630,770 2270,770 2270,500 1300,500 700,1100 700,3400 1300,4000 3600,4000 4200,3400 4200,1100 3600,500 3500,500

## Keep-outs
Keep-Out Layer:
  lines w78.74: 700,1100 700,3400 1300,4000 3600,4000 4200,3400 4200,1100 3600,500 3500,500 1300,500 700,1100

## Other copper
Top Layer:
  text "kosmx.dev" at 1220,3823.79 h60 r225
  text "kosmx.dev :D" at 3625,636.21 h60 r45

## Silkscreen, mask and mechanical layers (free items; w line width, h text height)
Mechanical 1:
  the board outline again, w19.68